# EAGLE board tentacle_tip (EAGLE 7.1.0)
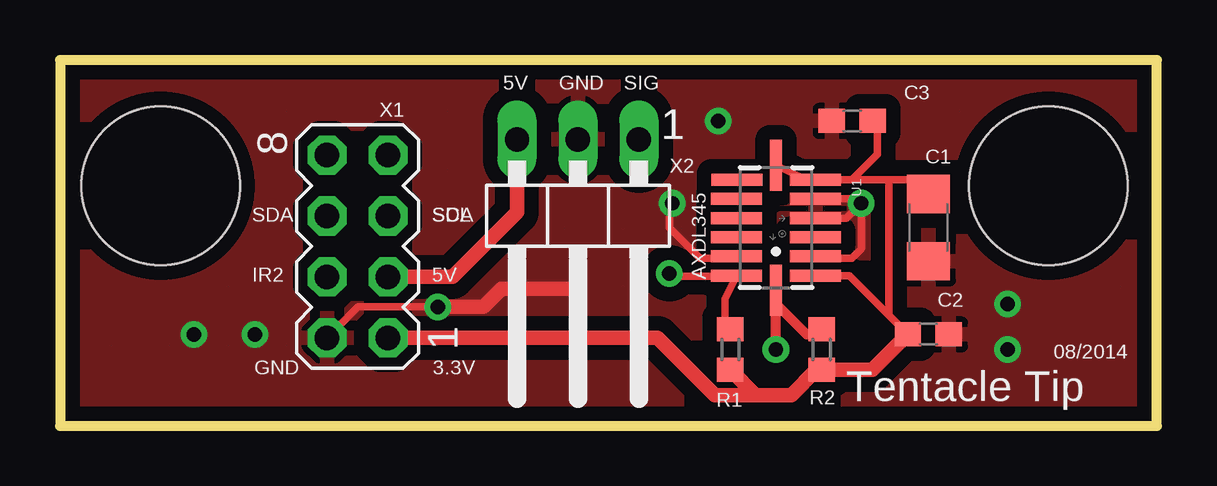
[diagram p0: board, top side]
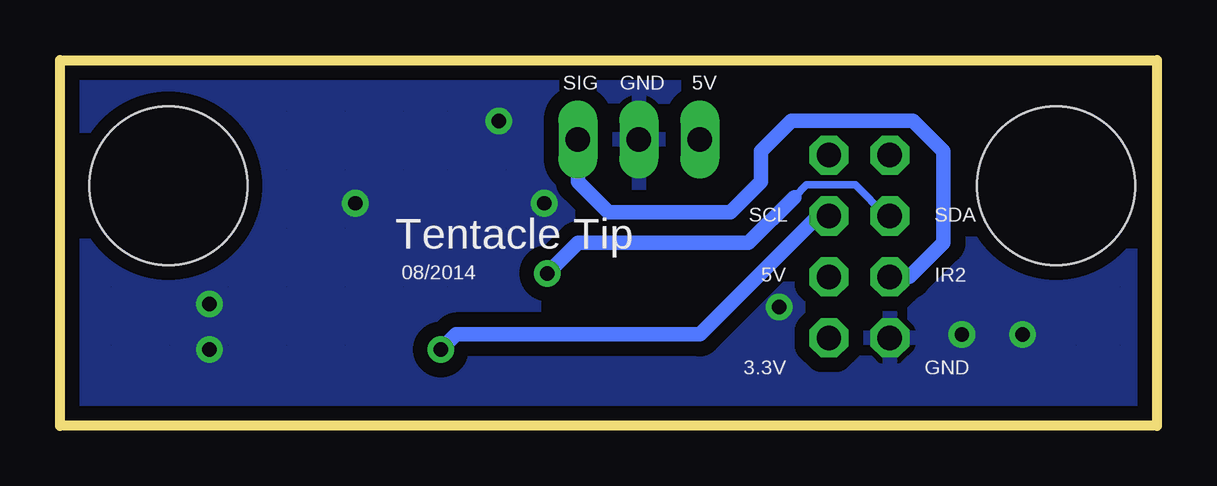
[diagram p1: board, bottom side, seen from below]

Size 45.72 x 15.24 mm. Coordinates in mm from the lower left corner, seen from the top.
Outline: 0,0 45.72,0 45.72,15.24 0,15.24 0,0
Copper layers (1*16): Top 0.035mm / dielectric 1.5mm / Bottom 0.035mm
Design rules "SparkFun": minimum track width 8mil, minimum drill 20mil, track to track 8mil, track to pad 8mil, pad to pad 8mil, via to via 8mil, smd to smd 8mil, copper to edge 10mil, drill to drill 8mil, minimum pad ring 12mil, minimum via ring 10mil, stop-mask expansion 4mil, vias tented up to drill 25mil, thermal gap 10mil
Holes 6.6 mm at 4.2,10 41.2,10

## Footprints (pad centres in the part's own frame; a part is rotated, then mirrored left to right if it is on the bottom)
C1206 = smd 1.6 x 1.8: 1 -1.4,0; 2 1.4,0
C0603 = smd 1.1 x 1: 1 -0.85,0; 2 0.85,0
R0603 = smd 1 x 1.1: 1 -0.85,0; 2 0.85,0
LGA14_LONG = smd 0.5 x 2.124: 1 2,1.638; 2 1.2,1.638; 3 0.4,1.638; 4 -0.4,1.638; 5 -1.2,1.638; 6 -2,1.638; 8 -2,-1.63; 9 -1.2,-1.638; 10 -0.4,-1.638; 11 0.4,-1.638; 12 1.2,-1.638; 13 2,-1.638 | smd 2.124 x 0.5: 7 -2.6,0; 14 2.6,0
MA04-2 = drill 1.016 octagon: 1 -3.81,-1.27; 2 -3.81,1.27; 3 -1.27,-1.27; 4 -1.27,1.27; 5 1.27,-1.27; 6 1.27,1.27; 7 3.81,-1.27; 8 3.81,1.27
1X03/90 = drill 1.016 long: 1 -2.54,-3.81; 2 0,-3.81; 3 2.54,-3.81

## Placement (x,y rotation side)
C1  10uF  [C1206]  36.2,8.26 270 top
C2  0.1uF  [C0603]  36.2,3.81 0 top
C3  0.1uF  [C0603]  33.02,12.7 180 top
R1  2.2k  [R0603]  27.94,3.17 270 top
R2  2.2k  [R0603]  31.75,3.17 270 top
U1  ADXL345  [LGA14_LONG]  29.84,8.26 270 top
X1  [MA04-2]  12.4,7.47 90 top
X2  [1X03/90]  21.59,8.12 180 top

## Library data of the parts
C1-C3 R1 R2 = rcl
U1 X2 = CBLA_Test_bed_Library
X1 = CBLA_Test_bed_Library; OC_FARNELL: unknown; OC_NEWARK: unknown

## Nets
+3.3V: C1.1 C2.1 C3.1 R1.2 R2.2 U1.1 U1.6 U1.7 X1.1
+5V: X1.3 X2.3
GND: C1.2 C2.2 C3.2 U1.2 U1.4 U1.5 U1.12 X1.2 X2.2
IR2: X1.4 X2.1
SCL: R2.1 U1.14 X1.5
SDA: R1.1 U1.13 X1.6

## Tracks (layer width: path | path; a pad name or v marks a point on that pad's centre or on a via)
+3.3V
  Top 0.305: 33.02,10.26 34.08,11.31 34.08,12.49 C3.1 | U1.1 32.9,6.25 34.54,4.61 | U1.7 30.88,10.36 U1.6 33.02,10.26 | 33.02,10.26 34.54,10.26 | 34.54,10.26 35.47,10.26 35.56,10.16 C1.1 | 34.54,10.26 34.54,4.61 | 34.54,4.61 C2.1
  Top 0.61: X1.1 24.91,3.66 27.3,1.27 29,1.27 | C2.1 33.86,2.33 R2.2 31.54,2.33 30.48,1.27 29,1.27 | R1.2 29,1.27
+5V
  Top 0.61: X1.3 16.36,6.2 19.05,8.89 X2.3
GND  (via drill 0.6)
  Top 0.305: 28.65,7.11 U1.12 28.14,6.99 26.67,6.99 25.4,8.26 25.4,9.14 v25.53,9.27 | U1.5 33.22,9.46 v33.4,9.27 | U1.4 32.78,8.65 v33.4,9.27 | v33.4,9.27 33.4,7.37 33.02,6.99 31.55,6.99 U1.2 | X1.2 12.42,4.95 v15.75,4.95
  Top 0.61: 21.59,5.71 18.41,5.71 17.65,4.95 v15.75,4.95
  other vias: 8.13,3.81 39.5,3.17 27.43,12.7 39.5,5.08 5.59,3.81
  pour Top (isolate 0.61, hatched): 0,15.24 0,0 45.72,0 45.72,15.24
  pour Bottom (isolate 0.61, hatched): 0,15.24 0,0 45.72,0 45.72,15.24
IR2
  Bottom 0.61: X1.4 10.31,6.2 8.89,7.62 8.89,11.43 10.16,12.7 15.24,12.7 16.51,11.43 16.51,10.16 17.78,8.89 22.86,8.89 24.13,10.16 X2.1
SCL  (via drill 0.6)
  Top 0.406: R2.1 31.54,3.81 31.11,3.81 29.84,5.08 U1.14 v29.84,3.17
  Bottom 0.61: v29.84,3.17 29.21,3.81 19.05,3.81 14.12,8.74 X1.5
SDA  (via drill 0.6)
  Top 0.305: R1.1 27.73,4.03 27.73,5.27 U1.13 28.68,6.22 25.53,6.22 v25.4,6.35
  Bottom 0.305: 15.11,9.53 14.61,10.03 12.57,10.03 11.28,8.74 X1.6
  Bottom 0.61: v25.4,6.35 24.13,7.62 17.02,7.62 15.11,9.53

## Text on the board
tPlace: 5V | GND | SIG | SDA | SCL | SDA | IR2 | 5V | AXDL345 | 08/2014 | GND | 3.3V | Tentacle Tip
bPlace: 5V | GND | SIG | SDA | SCL | Tentacle Tip | IR2 | 5V | 08/2014 | GND | 3.3V